# EAGLE board 2-28-13 x1_3 (EAGLE 6.3), part 1 of 2
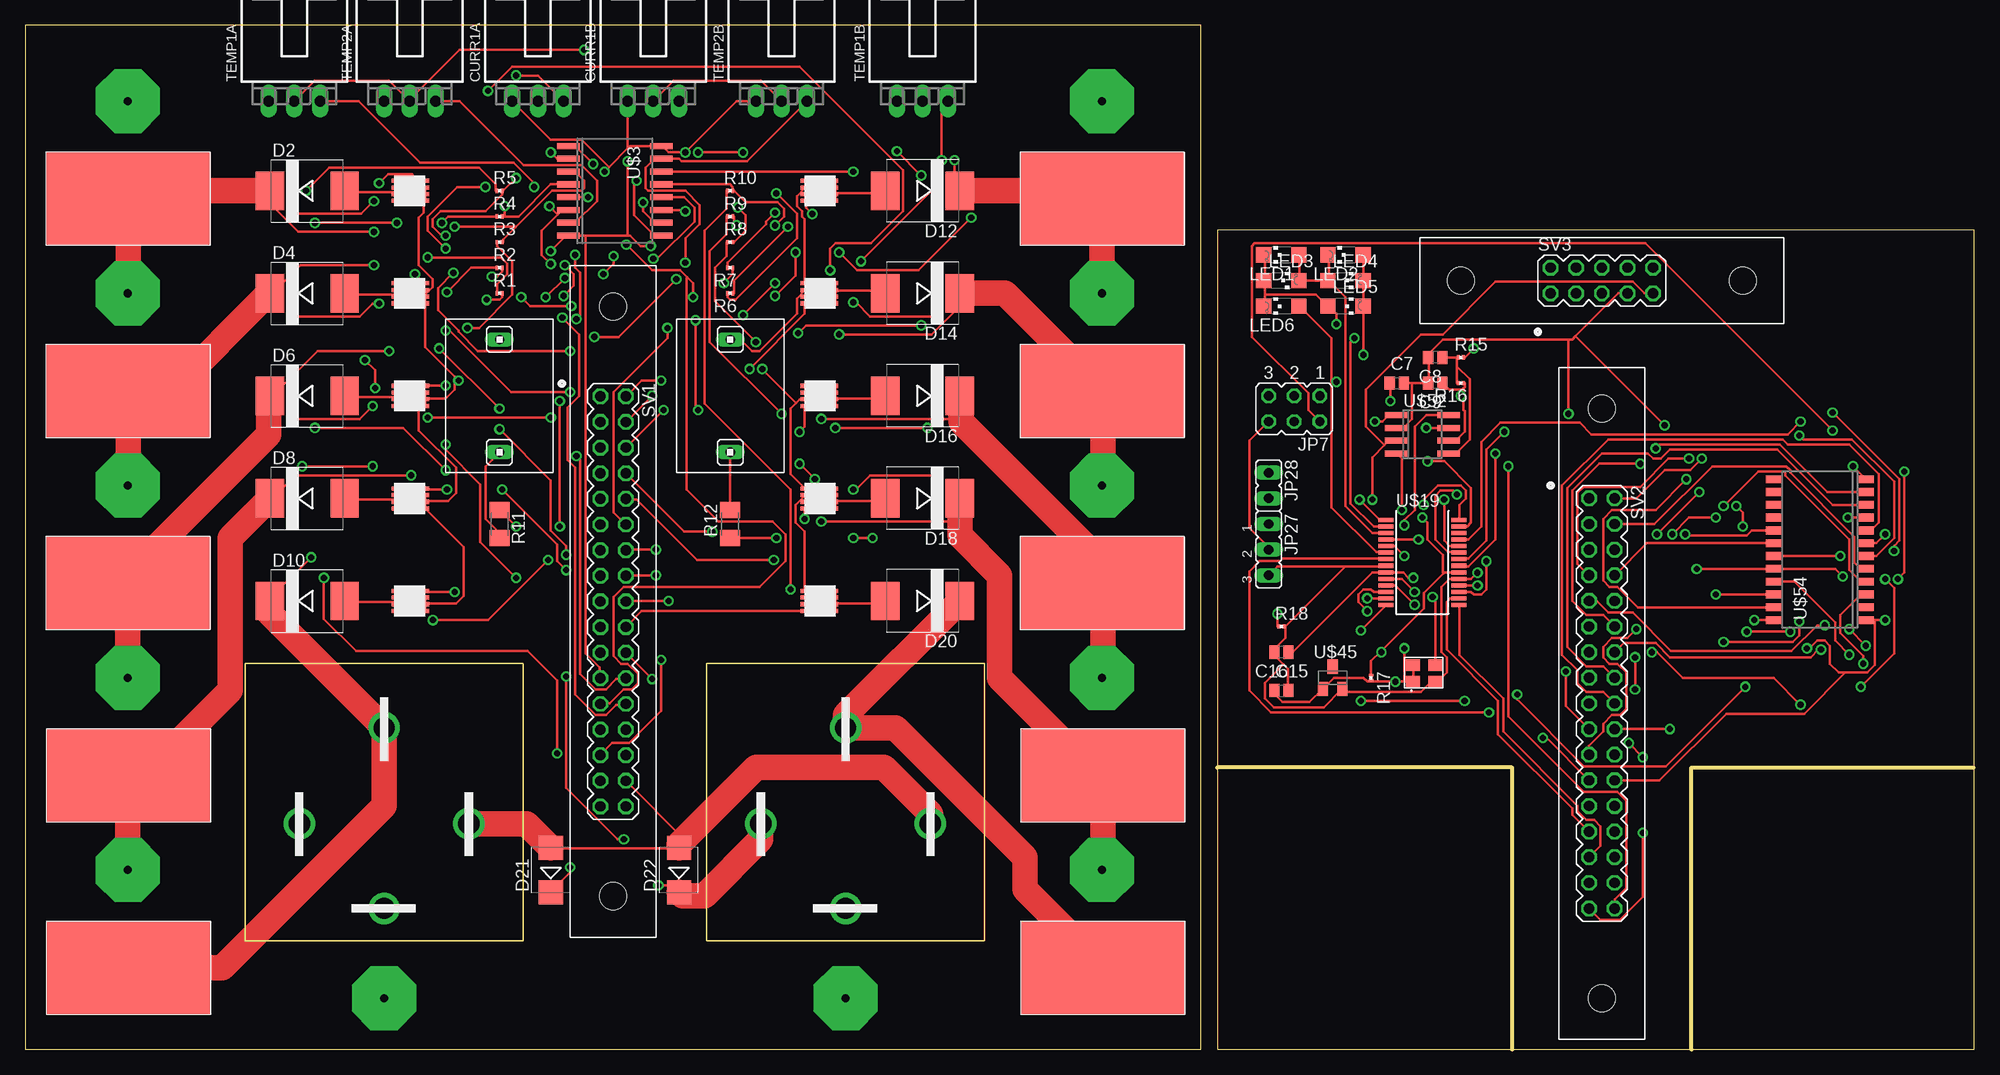
[diagram p0: board, top side]
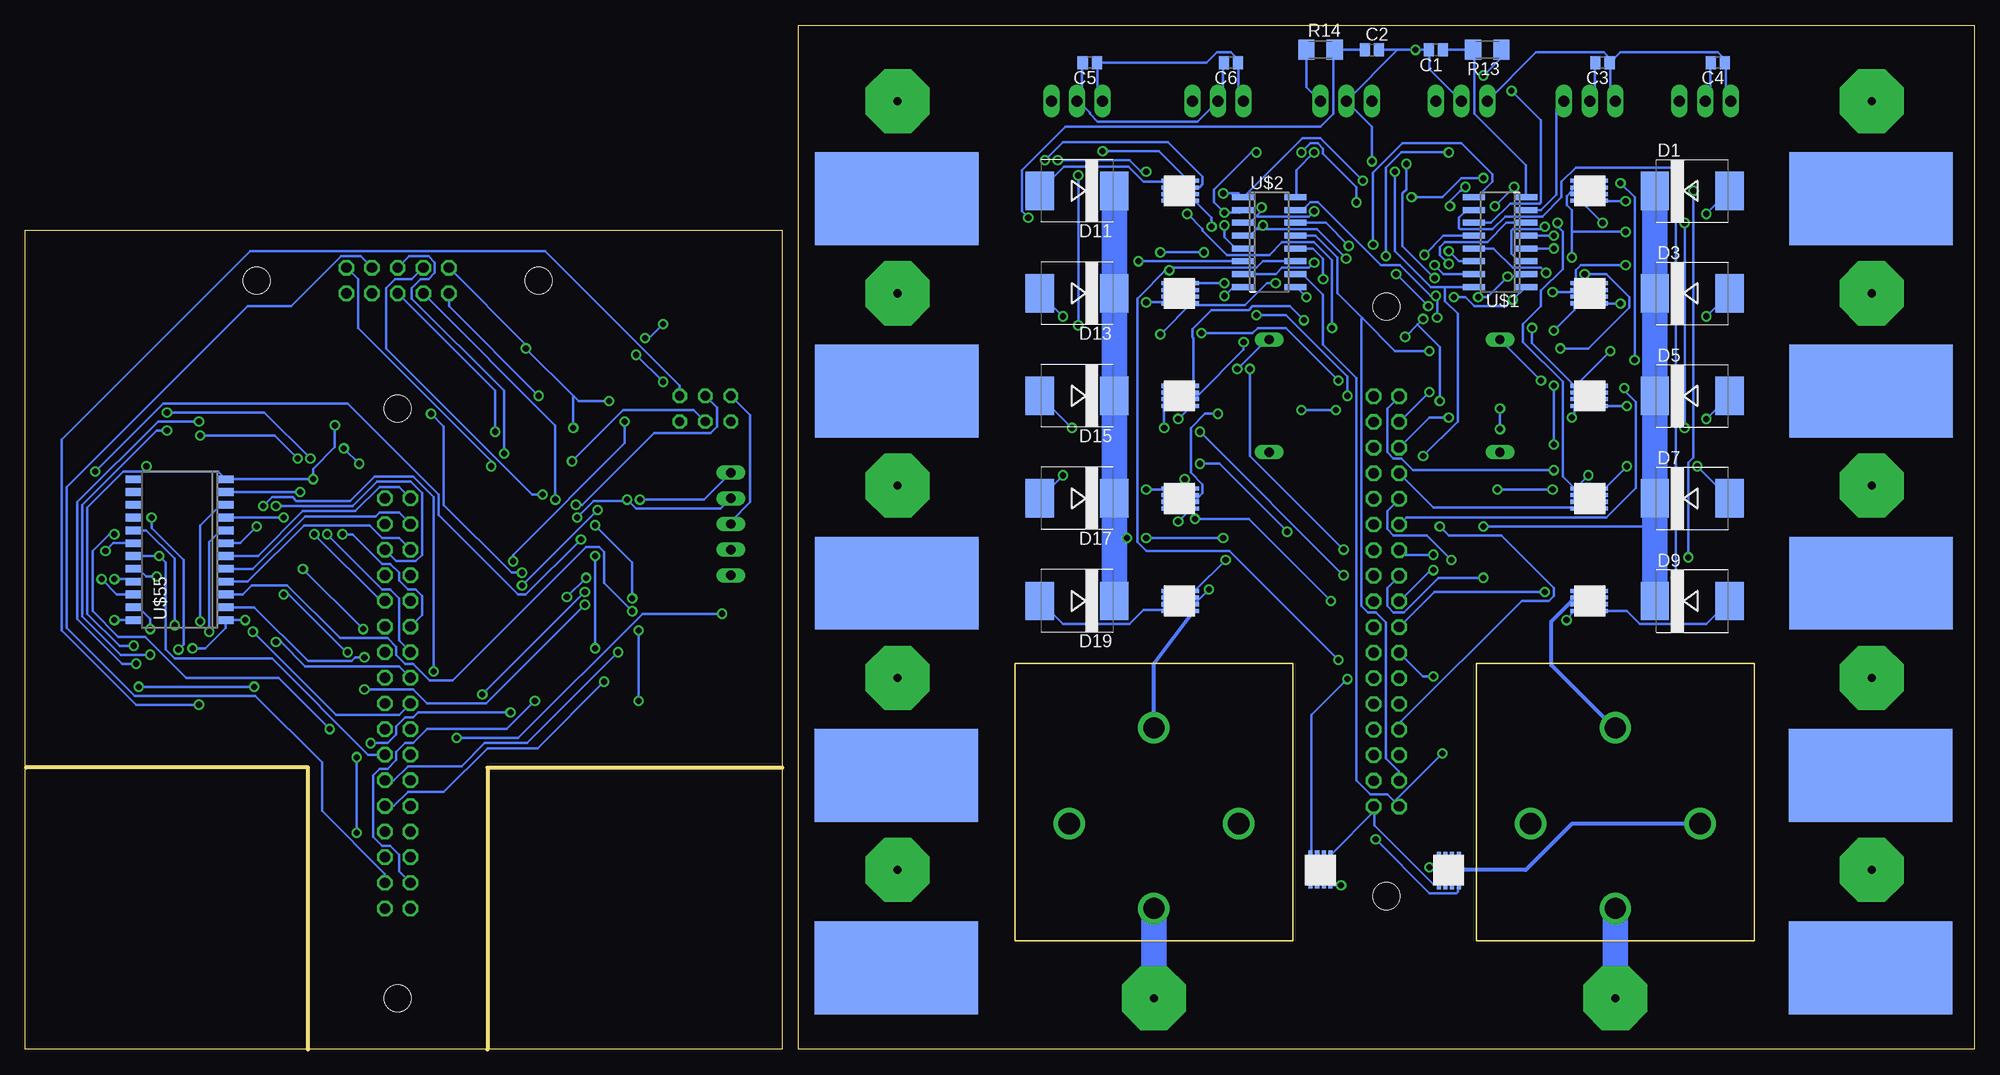
[diagram p1: board, bottom side, seen from below]

Size 193.11 x 101.5 mm. Coordinates in mm from the lower left corner, seen from the top.
Outline: 147.32,0 118.11,0 118.11,27.94
Outline: 147.32,0 165.1,0
Outline: 165.1,0 193.11,0 193.11,81.18 118.11,81.18 118.11,27.94
Outline: 147.32,0 147.32,27.94 118.11,27.94
Outline: 165.1,0 165.1,27.94 193.04,27.94
Outline: 0,0 116.48,0 116.48,101.5 0,101.5 0,0
Copper layers (1*16): Top 0.035mm / dielectric 1.5mm / Bottom 0.035mm
Design rules "default": minimum track width 10mil, minimum drill 24mil, track to track 8mil, track to pad 8mil, pad to pad 8mil, via to via 8mil, smd to smd 8mil, copper to edge 40mil, drill to drill 8mil, minimum pad ring 10mil, minimum via ring 8mil, stop-mask expansion 4mil, vias tented up to drill 0mil, thermal gap 10mil
tRestrict: area 118.1,0 to 147.3,27.9; area 165.1,0 to 193,27.9
bRestrict: area 165.1,0 to 193,27.9; area 118.1,0 to 147.3,27.9

## Footprints (pad centres in the part's own frame; a part is rotated, then mirrored left to right if it is on the bottom)
C0504 = smd 1 x 1.3: 1 -0.7,0; 2 0.7,0
70553-03 = drill 1.092 long: 1 -2.54,-7.62; 2 0,-7.62; 3 2.54,-7.62
SMC = smd 2.8 x 3.8: A 3.7,0; C -3.7,0
SMB = smd 2.4 x 2.4: A 2.2,0; C -2.2,0
JP3Q = drill 0.914 octagon: 1 -2.54,-1.27; 2 -2.54,1.27; 3 0,-1.27; 4 0,1.27; 5 2.54,-1.27; 6 2.54,1.27
JP2 = drill 0.914 long: 1 -2.54,0; 2 0,0; 3 2.54,0
JP1 = drill 0.914 long: 1 0,-1.27; 2 0,1.27
INDUCTOR_SOCKET = drill 0.914 long: P$1 -5.588,0; P$2 5.588,0
CHIPLED_1206 = smd 1.5 x 1.5: A 0,-1.75; C 0,1.75
R0201 = smd 0.28 x 0.43: 1 -0.255,0; 2 0.255,0
M1206 = smd 1.6 x 2: 1 -1.4,0; 2 1.4,0
MA17-2 = drill 1.016 octagon: 1 -20.32,-1.27; 2 -20.32,1.27; 3 -17.78,-1.27; 4 -17.78,1.27; 5 -15.24,-1.27; 6 -15.24,1.27; 7 -12.7,-1.27; 8 -12.7,1.27; 9 -10.16,-1.27; 10 -10.16,1.27; 11 -7.62,-1.27; 12 -7.62,1.27; 13 -5.08,-1.27; 14 -5.08,1.27; 15 -2.54,-1.27; 16 -2.54,1.27; 17 0,-1.27; 18 0,1.27; 19 2.54,-1.27; 20 2.54,1.27; 21 5.08,-1.27; 22 5.08,1.27; 23 7.62,-1.27; 24 7.62,1.27; 25 10.16,-1.27; 26 10.16,1.27; 27 12.7,-1.27; 28 12.7,1.27; 29 15.24,-1.27; 30 15.24,1.27; 31 17.78,-1.27; 32 17.78,1.27; 33 20.32,-1.27; 34 20.32,1.27 | hole 2.692: -29.21,0; 29.21,0
MA05-2 = drill 1.016 octagon: 1 -5.08,-1.27; 2 -5.08,1.27; 3 -2.54,-1.27; 4 -2.54,1.27; 5 0,-1.27; 6 0,1.27; 7 2.54,-1.27; 8 2.54,1.27; 9 5.08,-1.27; 10 5.08,1.27 | hole 2.692: -13.97,0; 13.97,0
SOIC16N = smd 0.6 x 2.2: 1 -4.445,-2.6; 2 -3.175,-2.6; 3 -1.905,-2.6; 4 -0.635,-2.6; 5 0.635,-2.6; 6 1.905,-2.6; 7 3.175,-2.6; 8 4.445,-2.6; 9 4.445,2.6; 10 3.175,2.6; 11 1.905,2.6; 12 0.635,2.6; 13 -0.635,2.6; 14 -1.905,2.6; 15 -3.175,2.6; 16 -4.445,2.6
SO16W = smd 0.6 x 2.2: 1 -4.445,-4.6; 2 -3.175,-4.6; 3 -1.905,-4.6; 4 -0.635,-4.6; 5 0.635,-4.6; 6 1.905,-4.6; 7 3.175,-4.6; 8 4.445,-4.6; 9 4.445,4.6; 10 3.175,4.6; 11 1.905,4.6; 12 0.635,4.6; 13 -0.635,4.6; 14 -1.905,4.6; 15 -3.175,4.6; 16 -4.445,4.6
POWERPAK1212-8 = smd 0.76 x 0.405: DRAIN5 1.435,-0.993; DRAIN6 1.435,-0.333; DRAIN7 1.435,0.333; DRAIN8 1.435,0.993 | smd 1.725 x 2.235: DRAIN_ALL 0.557,0 | smd 0.99 x 0.405: GATE -1.435,-0.993; SOURCE1 -1.435,0.993; SOURCE2 -1.435,0.333; SOURCE3 -1.435,-0.333
MOLEXCONN-SCREWHOLE = smd 16.2 x 9.2: P$1 8.1,4.6 | smd 16.2 x 9.2 bottom: P$2 8.1,4.6
SSOP28 = smd 0.4 x 1.5: 1 -4.225,-3.625; 2 -3.575,-3.625; 3 -2.925,-3.625; 4 -2.275,-3.625; 5 -1.625,-3.625; 6 -0.975,-3.625; 7 -0.325,-3.625; 8 0.325,-3.625; 9 0.975,-3.625; 10 1.625,-3.625; 11 2.275,-3.625; 12 2.925,-3.625; 13 3.575,-3.625; 14 4.225,-3.625; 15 4.225,3.625; 16 3.575,3.625; 17 2.925,3.625; 18 2.275,3.625; 19 1.625,3.625; 20 0.975,3.625; 21 0.325,3.625; 22 -0.325,3.625; 23 -0.975,3.625; 24 -1.625,3.625; 25 -2.275,3.625; 26 -2.925,3.625; 27 -3.575,3.625; 28 -4.225,3.625
MOLEXCONN-SCREWHOLE-NEG = drill 0.8 pad 6.35 octagon: P$1 0,0
PB1039 = drill 2.1: P$1 0,0; P$2 8.4,-8.4; P$3 8.4,8.4; P$4 17.9,0
SOT23 = smd 1 x 1.4: 1 -0.95,-1.1; 2 0.95,-1.1; 3 0,1.1
SO-08 = smd 0.6 x 2.2: 1 -1.905,-2.6; 2 -0.635,-2.6; 3 0.635,-2.6; 4 1.905,-2.6; 5 1.905,2.6; 6 0.635,2.6; 7 -0.635,2.6; 8 -1.905,2.6
CTS632 = smd 1.397 x 1.143: 1 -2.21,-1.651; 2 0,-1.651; 3 0,0; 4 -2.21,0
SOIC-24 = smd 0.762 x 1.524: 1 -6.985,-4.6; 2 -5.715,-4.6; 3 -4.445,-4.6; 4 -3.175,-4.6; 5 -1.905,-4.6; 6 -0.635,-4.6; 7 0.635,-4.6; 8 1.905,-4.6; 9 3.175,-4.6; 10 4.445,-4.6; 11 5.715,-4.6; 12 6.985,-4.6; 13 6.985,4.6; 14 5.715,4.6; 15 4.445,4.6; 16 3.175,4.6; 17 1.905,4.6; 18 0.635,4.6; 19 -0.635,4.6; 20 -1.905,4.6; 21 -3.175,4.6; 22 -4.445,4.6; 23 -5.715,4.6; 24 -6.985,4.6

## Placement (x,y rotation side)
C1  0.1uF  [C0504]  53.34,99.06 180 bottom
C2  0.1uF  [C0504]  59.69,99.06 0 bottom
C3  0.1uF  [C0504]  36.83,97.79 180 bottom
C4  0.1uF  [C0504]  25.4,97.79 180 bottom
C5  0.1uF  [C0504]  87.63,97.79 180 bottom
C6  0.1uF  [C0504]  73.66,97.79 180 bottom
C7  100pF  [C0504]  135.89,66.04 0 top
C8  47nF  [C0504]  139.7,68.58 180 top
C9  100pF  [C0504]  139.7,66.04 180 top
C15  10nF  [C0504]  124.46,35.56 0 top
C16  15pF  [C0504]  124.46,39.37 180 top
CURR1A  C-GRID-03-70553  [70553-03]  50.8,101.6 0 top
CURR1B  C-GRID-03-70553  [70553-03]  62.23,101.6 0 top
D1  [SMC]  27.94,85.09 0 bottom
D2  [SMC]  27.94,85.09 0 top
D3  [SMC]  27.94,74.93 0 bottom
D4  [SMC]  27.94,74.93 0 top
D5  [SMC]  27.94,64.77 0 bottom
D6  [SMC]  27.94,64.77 0 top
D7  [SMC]  27.94,54.61 0 bottom
D8  [SMC]  27.94,54.61 0 top
D9  [SMC]  27.94,44.45 0 bottom
D10  [SMC]  27.94,44.45 0 top
D11  [SMC]  88.9,85.09 180 bottom
D12  [SMC]  88.9,85.09 180 top
D13  [SMC]  88.9,74.93 180 bottom
D14  [SMC]  88.9,74.93 180 top
D15  [SMC]  88.9,64.77 180 bottom
D16  [SMC]  88.9,64.77 180 top
D17  [SMC]  88.9,54.61 180 bottom
D18  [SMC]  88.9,54.61 180 top
D19  [SMC]  88.9,44.45 180 bottom
D20  [SMC]  88.9,44.45 180 top
D21  [SMB]  52.07,17.78 90 top
D22  [SMB]  64.77,17.78 90 top
JP7  [JP3Q]  125.73,63.5 180 top
JP27  [JP2]  123.19,49.53 270 top
JP28  [JP1]  123.19,55.88 180 top
L1  INDUCTOR_SOCKET  [INDUCTOR_SOCKET]  46.99,64.77 90 top
L2  INDUCTOR_SOCKET  [INDUCTOR_SOCKET]  69.85,64.77 90 top
LED1  [CHIPLED_1206]  124.46,78.74 90 top
LED2  [CHIPLED_1206]  130.81,78.74 90 top
LED3  [CHIPLED_1206]  124.46,76.2 270 top
LED4  [CHIPLED_1206]  130.81,76.2 270 top
LED5  [CHIPLED_1206]  130.81,73.66 270 top
LED6  [CHIPLED_1206]  124.46,73.66 90 top
R1  3.3M  [R0201]  46.99,74.93 0 top
R2  3.3M  [R0201]  46.99,77.47 0 top
R3  3.3M  [R0201]  46.99,80.01 0 top
R4  3.3M  [R0201]  46.99,82.55 0 top
R5  3.3M  [R0201]  46.99,85.09 0 top
R6  3.3M  [R0201]  69.85,74.93 180 top
R7  3.3M  [R0201]  69.85,77.47 180 top
R8  3.3M  [R0201]  69.85,80.01 0 top
R9  3.3M  [R0201]  69.85,82.55 0 top
R10  3.3M  [R0201]  69.85,85.09 0 top
R11  [M1206]  46.99,52.07 270 top
R12  [M1206]  69.85,52.07 90 top
R13  1K  [M1206]  48.26,99.06 180 bottom
R14  1K  [M1206]  64.77,99.06 0 bottom
R15  1k3  [R0201]  142.24,68.58 0 top
R16  1k3  [R0201]  142.24,66.04 180 top
R17  150  [R0201]  133.35,36.83 270 top
R18  0  [R0201]  124.46,41.91 0 top
SV1  [MA17-2]  58.24,44.4 270 top
SV2  [MA17-2]  156.21,34.29 270 top
SV3  AMP_LATCH_10  [MA05-2]  156.21,76.2 0 top
TEMP1A  C-GRID-03-70553  [70553-03]  26.67,101.6 0 top
TEMP1B  C-GRID-03-70553  [70553-03]  88.9,101.6 0 top
TEMP2A  C-GRID-03-70553  [70553-03]  38.1,101.6 0 top
TEMP2B  C-GRID-03-70553  [70553-03]  74.93,101.6 0 top
U$1  MCP3008  [SOIC16N]  46.99,80.01 90 bottom
U$2  MCP3008  [SOIC16N]  69.85,80.01 270 bottom
U$3  SP720APP  [SO16W]  58.42,85.09 270 top
U$4  SIS322DNT-T1-GE3POWERPAK1212-8  [POWERPAK1212-8]  38.1,85.09 0 bottom
U$5  SIS322DNT-T1-GE3POWERPAK1212-8  [POWERPAK1212-8]  38.1,85.09 180 top
U$6  SIS322DNT-T1-GE3POWERPAK1212-8  [POWERPAK1212-8]  38.1,74.93 0 bottom
U$7  SIS322DNT-T1-GE3POWERPAK1212-8  [POWERPAK1212-8]  38.1,74.93 180 top
U$8  SIS322DNT-T1-GE3POWERPAK1212-8  [POWERPAK1212-8]  38.1,64.77 0 bottom
U$9  SIS322DNT-T1-GE3POWERPAK1212-8  [POWERPAK1212-8]  38.1,64.77 180 top
U$10  SIS322DNT-T1-GE3POWERPAK1212-8  [POWERPAK1212-8]  38.1,54.61 0 bottom
U$11  SIS322DNT-T1-GE3POWERPAK1212-8  [POWERPAK1212-8]  38.1,54.61 180 top
U$12  SIS322DNT-T1-GE3POWERPAK1212-8  [POWERPAK1212-8]  38.1,44.45 0 bottom
U$13  SIS322DNT-T1-GE3POWERPAK1212-8  [POWERPAK1212-8]  38.1,44.45 180 top
U$14  MOLEXCONN-SCREWHOLE  [MOLEXCONN-SCREWHOLE]  18.32,88.9 180 top
U$15  MOLEXCONN-SCREWHOLE  [MOLEXCONN-SCREWHOLE]  18.32,69.85 180 top
U$16  MOLEXCONN-SCREWHOLE  [MOLEXCONN-SCREWHOLE]  18.34,50.8 180 top
U$17  MOLEXCONN-SCREWHOLE  [MOLEXCONN-SCREWHOLE]  18.36,31.75 180 top
U$18  MOLEXCONN-SCREWHOLE  [MOLEXCONN-SCREWHOLE]  18.38,12.7 180 top
U$19  PIC18F23K22  [SSOP28]  138.43,48.26 270 top
U$20  MOLEXCONN-SCREWHOLE-NEG  [MOLEXCONN-SCREWHOLE-NEG]  10.16,93.98 0 top
U$21  PB1039  [PB1039]  35.56,13.97 90 top
U$22  MOLEXCONN-SCREWHOLE-NEG  [MOLEXCONN-SCREWHOLE-NEG]  10.16,74.93 0 top
U$23  SIS322DNT-T1-GE3POWERPAK1212-8  [POWERPAK1212-8]  52.07,17.78 90 bottom
U$24  MOLEXCONN-SCREWHOLE-NEG  [MOLEXCONN-SCREWHOLE-NEG]  10.16,55.88 0 top
U$25  MOLEXCONN-SCREWHOLE-NEG  [MOLEXCONN-SCREWHOLE-NEG]  10.16,36.83 0 top
U$26  SIS322DNT-T1-GE3POWERPAK1212-8  [POWERPAK1212-8]  78.74,85.09 180 bottom
U$27  SIS322DNT-T1-GE3POWERPAK1212-8  [POWERPAK1212-8]  78.74,85.09 0 top
U$28  MOLEXCONN-SCREWHOLE-NEG  [MOLEXCONN-SCREWHOLE-NEG]  10.16,17.78 0 top
U$29  MOLEXCONN-SCREWHOLE-NEG  [MOLEXCONN-SCREWHOLE-NEG]  35.56,5.08 0 top
U$30  SIS322DNT-T1-GE3POWERPAK1212-8  [POWERPAK1212-8]  78.74,74.93 180 bottom
U$31  SIS322DNT-T1-GE3POWERPAK1212-8  [POWERPAK1212-8]  78.74,74.93 0 top
U$32  SIS322DNT-T1-GE3POWERPAK1212-8  [POWERPAK1212-8]  78.74,64.77 180 bottom
U$33  SIS322DNT-T1-GE3POWERPAK1212-8  [POWERPAK1212-8]  78.74,64.77 0 top
U$34  SIS322DNT-T1-GE3POWERPAK1212-8  [POWERPAK1212-8]  78.74,54.61 180 bottom
U$35  SIS322DNT-T1-GE3POWERPAK1212-8  [POWERPAK1212-8]  78.74,54.61 0 top
U$36  SIS322DNT-T1-GE3POWERPAK1212-8  [POWERPAK1212-8]  78.74,44.45 180 bottom
U$37  SIS322DNT-T1-GE3POWERPAK1212-8  [POWERPAK1212-8]  78.74,44.45 0 top
U$38  SIS322DNT-T1-GE3POWERPAK1212-8  [POWERPAK1212-8]  64.77,17.78 270 bottom
U$39  PB1039  [PB1039]  81.28,13.97 90 top
U$40  MOLEXCONN-SCREWHOLE  [MOLEXCONN-SCREWHOLE]  114.84,88.9 180 top
U$41  MOLEXCONN-SCREWHOLE  [MOLEXCONN-SCREWHOLE]  114.86,69.85 180 top
U$42  MOLEXCONN-SCREWHOLE  [MOLEXCONN-SCREWHOLE]  114.88,50.8 180 top
U$43  MOLEXCONN-SCREWHOLE  [MOLEXCONN-SCREWHOLE]  114.9,31.75 180 top
U$44  MOLEXCONN-SCREWHOLE  [MOLEXCONN-SCREWHOLE]  114.92,12.7 180 top
U$45  LM4040  [SOT23]  129.54,36.83 0 top
U$46  MOLEXCONN-SCREWHOLE-NEG  [MOLEXCONN-SCREWHOLE-NEG]  106.68,93.98 0 top
U$47  MOLEXCONN-SCREWHOLE-NEG  [MOLEXCONN-SCREWHOLE-NEG]  106.68,74.93 0 top
U$48  MOLEXCONN-SCREWHOLE-NEG  [MOLEXCONN-SCREWHOLE-NEG]  106.68,55.88 0 top
U$49  MOLEXCONN-SCREWHOLE-NEG  [MOLEXCONN-SCREWHOLE-NEG]  106.68,36.83 0 top
U$50  MOLEXCONN-SCREWHOLE-NEG  [MOLEXCONN-SCREWHOLE-NEG]  106.68,17.78 0 top
U$51  MOLEXCONN-SCREWHOLE-NEG  [MOLEXCONN-SCREWHOLE-NEG]  81.28,5.08 0 top
U$52  TJA1040  [SO-08]  138.43,60.96 270 top
U$53  CTS632  [CTS632]  139.7,38.1 0 top
U$54  CD4514BM96E4  [SOIC-24]  177.8,49.53 90 top
U$55  CD4514BM96E4  [SOIC-24]  177.8,49.53 90 bottom

## Library data of the parts
C1-C6 = resistor
C7-C9 C15 C16 R1-R18 = rcl
CURR1A CURR1B TEMP1A TEMP1B TEMP2A TEMP2B = con-molex; OC_FARNELL: unknown; OC_NEWARK: unknown
D1-D22 = diode
JP7 JP27 JP28 = jumper
L1 L2 U$1-U$18 U$20-U$44 U$46-U$51 U$54 U$55 = SolarJackets_BMS
LED1-LED6 = led
SV1 SV2 = SolarJackets_BMS; OC_FARNELL: unknown; OC_NEWARK: unknown
SV3 = SolarJackets_BMS; PART_NUM: 5499922-1
U$19 U$45 U$52 = sj 9-29
U$53 = SolarJackets

## Nets
12V+: SV1.34 U$23.SOURCE1 U$23.SOURCE2 U$23.SOURCE3 U$38.SOURCE1 U$38.SOURCE2 U$38.SOURCE3
12V+1: SV2.34 SV3.10
12V-: D21.A D22.A SV1.32 U$21.P$2 U$39.P$2
12V-1: SV2.32 SV3.8
AGND_PLANE: C1.2 C2.2 C3.2 C4.2 C5.2 C6.2 CURR1A.2 CURR1B.2 SV1.23 TEMP1A.2 TEMP1B.2 TEMP2A.2 TEMP2B.2 U$1.14 U$2.14 U$3.8
AGND_PLANE1: R18.1 SV2.23
CAN: U$19.13 U$52.8
CANH: C7.1 R15.2 SV3.2 U$52.7
CANL: C9.1 R16.1 SV3.1 U$52.6
CH0A: D2.C R1.1 U$4.SOURCE1 U$4.SOURCE2 U$4.SOURCE3 U$14.P$1 U$22.P$1
CH0B: D12.C R6.1 U$26.SOURCE1 U$26.SOURCE2 U$26.SOURCE3 U$40.P$1 U$47.P$1
CH1A: D4.C R2.1 U$6.SOURCE1 U$6.SOURCE2 U$6.SOURCE3 U$15.P$1 U$24.P$1
CH1B: D14.C R7.1 U$30.SOURCE1 U$30.SOURCE2 U$30.SOURCE3 U$41.P$1 U$48.P$1
CH2A: D6.C R3.1 U$8.SOURCE1 U$8.SOURCE2 U$8.SOURCE3 U$16.P$1 U$25.P$1
CH2B: D16.C R8.1 U$32.SOURCE1 U$32.SOURCE2 U$32.SOURCE3 U$42.P$1 U$49.P$1
CH3A: D8.C R4.1 U$10.SOURCE1 U$10.SOURCE2 U$10.SOURCE3 U$17.P$1 U$28.P$1
CH3B: D18.C R9.1 U$34.SOURCE1 U$34.SOURCE2 U$34.SOURCE3 U$43.P$1 U$50.P$1
CH4A: D10.C R5.1 U$12.SOURCE1 U$12.SOURCE2 U$12.SOURCE3 U$18.P$1 U$21.P$4
CH4B: D20.C R10.1 U$36.SOURCE1 U$36.SOURCE2 U$36.SOURCE3 U$39.P$4 U$44.P$1
CH5A: TEMP1A.3 U$1.6 U$3.6
CH5B: TEMP1B.3 U$2.6 U$3.14
CH6A: TEMP2A.3 U$1.7 U$3.7
CH6B: TEMP2B.3 U$2.7 U$3.15
CH7A: C1.1 R13.2 U$1.8
CH7B: C2.1 R14.2 U$2.8
CLK: SV1.31 U$1.13 U$2.13
CLK1: SV2.31 U$19.14
CS: SV1.33 U$1.10 U$2.10
CS1: SV2.33 U$19.7
DGND: SV1.25 U$1.9 U$2.9
DGND1: SV2.25
DIN: SV1.29 U$1.11 U$2.11
DIN1: SV2.29 U$19.15
DOUT: SV1.27 U$1.12 U$2.12
DOUT1: SV2.27 U$19.16
GND: C7.2 C8.2 C9.2 C15.2 C16.2 JP27.3 R18.2 SV3.7 U$19.8 U$19.19 U$45.2 U$52.2 U$53.2 U$54.12 U$54.23 U$55.12 U$55.23
I2C_CS: SV3.6 U$19.21
I2C_SCL: SV3.5 U$19.22
I2C_SDI: SV3.4 U$19.23
I2C_SDO: SV3.3 U$19.24
N$1: R5.2 U$1.5 U$3.5
N$2: R4.2 U$1.4 U$3.4
N$3: R3.2 U$1.3 U$3.3
N$4: R2.2 U$1.2 U$3.2
N$5: R1.2 U$1.1 U$3.1
N$6: CURR1A.3 R13.1
N$7: CURR1B.3 R14.1
N$8: D1.A U$4.DRAIN5 U$4.DRAIN6 U$4.DRAIN7 U$4.DRAIN8 U$4.DRAIN_ALL
N$9: LED1.A LED2.C LED3.C LED4.A U$19.3
N$10: LED1.C LED3.A LED5.A LED6.C U$19.2
N$11: R10.2 U$2.5 U$3.13
N$12: R9.2 U$2.4 U$3.12
N$13: R8.2 U$2.3 U$3.11
N$14: R7.2 U$2.2 U$3.10
N$15: R6.2 U$2.1 U$3.9
N$16: D2.A U$5.DRAIN5 U$5.DRAIN6 U$5.DRAIN7 U$5.DRAIN8 U$5.DRAIN_ALL
N$17: D21.C U$21.P$3 U$23.DRAIN5 U$23.DRAIN6 U$23.DRAIN7 U$23.DRAIN8 U$23.DRAIN_ALL
N$18: L1.P$1 R11.2
N$19: LED2.A LED4.C LED5.C LED6.A U$19.6
N$20: U$19.18 U$52.4
N$21: U$19.17 U$52.1
N$22: JP28.1 U$19.1
N$23: D3.A U$6.DRAIN5 U$6.DRAIN6 U$6.DRAIN7 U$6.DRAIN8 U$6.DRAIN_ALL
N$24: D4.A U$7.DRAIN5 U$7.DRAIN6 U$7.DRAIN7 U$7.DRAIN8 U$7.DRAIN_ALL
N$25: U$21.P$1 U$29.P$1
N$26: D11.A U$26.DRAIN5 U$26.DRAIN6 U$26.DRAIN7 U$26.DRAIN8 U$26.DRAIN_ALL
N$27: D5.A U$8.DRAIN5 U$8.DRAIN6 U$8.DRAIN7 U$8.DRAIN8 U$8.DRAIN_ALL
N$28: D6.A U$9.DRAIN5 U$9.DRAIN6 U$9.DRAIN7 U$9.DRAIN8 U$9.DRAIN_ALL
N$29: D12.A U$27.DRAIN5 U$27.DRAIN6 U$27.DRAIN7 U$27.DRAIN8 U$27.DRAIN_ALL
N$30: U$19.4 U$55.22
N$31: D7.A U$10.DRAIN5 U$10.DRAIN6 U$10.DRAIN7 U$10.DRAIN8 U$10.DRAIN_ALL
N$32: D8.A U$11.DRAIN5 U$11.DRAIN6 U$11.DRAIN7 U$11.DRAIN8 U$11.DRAIN_ALL
N$33: U$20.P$1
N$34: D13.A U$30.DRAIN5 U$30.DRAIN6 U$30.DRAIN7 U$30.DRAIN8 U$30.DRAIN_ALL
N$35: D9.A U$12.DRAIN5 U$12.DRAIN6 U$12.DRAIN7 U$12.DRAIN8 U$12.DRAIN_ALL
N$36: D10.A U$13.DRAIN5 U$13.DRAIN6 U$13.DRAIN7 U$13.DRAIN8 U$13.DRAIN_ALL
N$37: D14.A U$31.DRAIN5 U$31.DRAIN6 U$31.DRAIN7 U$31.DRAIN8 U$31.DRAIN_ALL
N$38: D15.A U$32.DRAIN5 U$32.DRAIN6 U$32.DRAIN7 U$32.DRAIN8 U$32.DRAIN_ALL
N$39: D16.A U$33.DRAIN5 U$33.DRAIN6 U$33.DRAIN7 U$33.DRAIN8 U$33.DRAIN_ALL
N$40: U$19.10 U$55.21
N$41: D17.A U$34.DRAIN5 U$34.DRAIN6 U$34.DRAIN7 U$34.DRAIN8 U$34.DRAIN_ALL
N$42: D18.A U$35.DRAIN5 U$35.DRAIN6 U$35.DRAIN7 U$35.DRAIN8 U$35.DRAIN_ALL
N$43: D19.A U$36.DRAIN5 U$36.DRAIN6 U$36.DRAIN7 U$36.DRAIN8 U$36.DRAIN_ALL
N$44: D20.A U$37.DRAIN5 U$37.DRAIN6 U$37.DRAIN7 U$37.DRAIN8 U$37.DRAIN_ALL
N$45: L2.P$2 U$27.SOURCE1 U$27.SOURCE2 U$27.SOURCE3 U$31.SOURCE1 U$31.SOURCE2 U$31.SOURCE3 U$33.SOURCE1 U$33.SOURCE2 U$33.SOURCE3 U$35.SOURCE1 U$35.SOURCE2 U$35.SOURCE3 U$37.SOURCE1 U$37.SOURCE2 U$37.SOURCE3
N$46: U$39.P$1 U$51.P$1
N$47: D22.C U$38.DRAIN5 U$38.DRAIN6 U$38.DRAIN7 U$38.DRAIN8 U$38.DRAIN_ALL U$39.P$3
N$48: U$46.P$1
N$49: D11.C D13.C D15.C D17.C D19.C R12.1
N$50: L2.P$1 R12.2
N$51: U$19.11 U$55.2
N$52: U$19.12 U$55.3
N$53: JP7.5 JP27.1
N$54: JP7.6 JP27.2
N$55: U$54.2
N$56: U$19.25 U$54.3
N$57: JP7.1 U$54.22
N$58: JP7.2 U$54.21
N$59: L1.P$2 U$5.SOURCE1 U$5.SOURCE2 U$5.SOURCE3 U$7.SOURCE1 U$7.SOURCE2 U$7.SOURCE3 U$9.SOURCE1 U$9.SOURCE2 U$9.SOURCE3 U$11.SOURCE1 U$11.SOURCE2 U$11.SOURCE3 U$13.SOURCE1 U$13.SOURCE2 U$13.SOURCE3
N$74: D1.C D3.C D5.C D7.C D9.C R11.1
N$75: C8.1 R15.1 R16.2 U$52.5
N$78: C16.1 U$19.9 U$53.3
PGC: JP7.4 U$19.27
PGD: JP7.3 U$19.28
RELAYA: SV1.21 U$23.GATE
RELAYA1: SV2.21 U$54.20 U$55.20
RELAYB: SV1.22 U$38.GATE
RELAYB1: SV2.22 U$54.19 U$55.19
VDD_PLANE: C3.1 C4.1 C5.1 C6.1 CURR1A.1 CURR1B.1 SV1.24 TEMP1A.1 TEMP1B.1 TEMP2A.1 TEMP2B.1 U$1.16 U$2.16 U$3.16
VDD_PLANE1: JP28.2 R17.1 SV2.24 SV3.9 U$19.20 U$52.3 U$54.1 U$54.24 U$55.1 U$55.24
VREF: SV1.26 U$1.15 U$2.15
VREF1: C15.1 R17.2 SV2.26 U$19.5 U$45.1 U$53.1 U$53.4
X0A: SV1.1 U$4.GATE
X0A1: SV2.1 U$55.6
X0B: SV1.2 U$26.GATE
X0B1: SV2.2 U$54.6
X1A: SV1.3 U$6.GATE
X1A1: SV2.3 U$55.5
X1B: SV1.4 U$30.GATE
X1B1: SV2.4 U$54.5
X2A: SV1.5 U$8.GATE
X2A1: SV2.5 U$55.4
X2B: SV1.6 U$32.GATE
X2B1: SV2.6 U$54.4
X3A: SV1.7 U$10.GATE
X3A1: SV2.7 U$55.18
X3B: SV1.8 U$34.GATE
X3B1: SV2.8 U$54.18
X4A: SV1.9 U$12.GATE
X4A1: SV2.9 U$55.17
X4B: SV1.10 U$36.GATE
X4B1: SV2.10 U$54.17
Y0A: SV1.11 U$5.GATE
Y0A1: SV2.11 U$55.11
Y0B: SV1.12 U$27.GATE
Y0B1: SV2.12 U$54.11
Y1A: SV1.13 U$7.GATE
Y1A1: SV2.13 U$55.9
Y1B: SV1.14 U$31.GATE
Y1B1: SV2.14 U$54.9
Y2A: SV1.15 U$9.GATE
Y2A1: SV2.15 U$55.10
Y2B: SV1.16 U$33.GATE
Y2B1: SV2.16 U$54.10
Y3A: SV1.17 U$11.GATE
Y3A1: SV2.17 U$55.8
Y3B: SV1.18 U$35.GATE
Y3B1: SV2.18 U$54.8
Y4A: SV1.19 U$13.GATE
Y4A1: SV2.19 U$55.7
Y4B: SV1.20 U$37.GATE
Y4B1: SV2.20 U$54.7